# Altium PCB Mynd_Conn.PcbDoc
Units mm, origin at the board's own origin, x right, y up, seen from the top; angles counter-clockwise.
Board outline 27 x 54 mm, 2 copper layers (Component Side, Solder Side), stack 1.58 mm thick; 16 components, 8 nets, 36 pads, 18 vias.
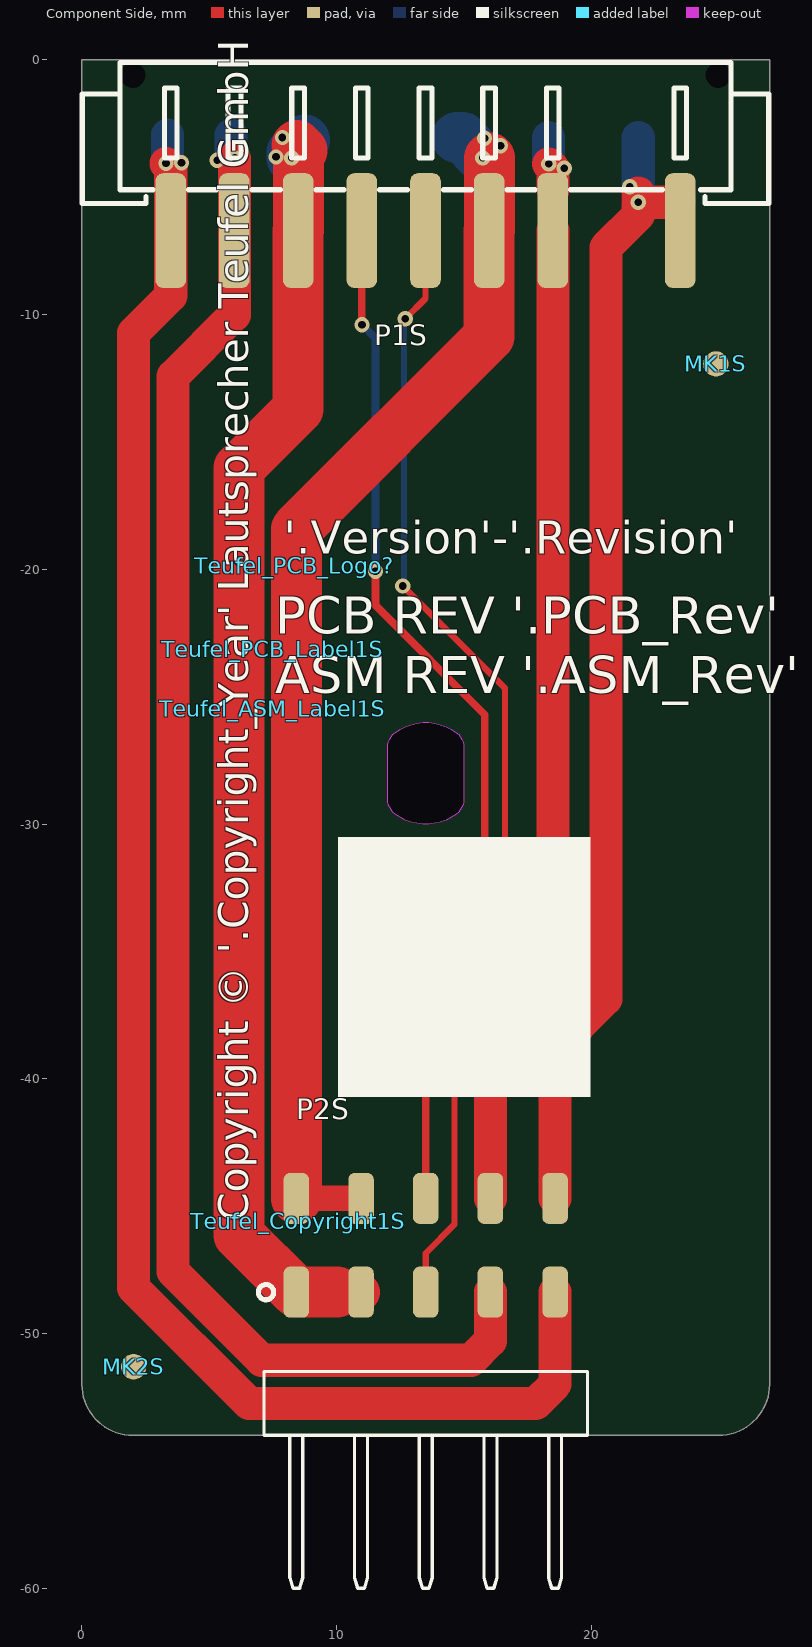
[diagram p0: Component Side view]
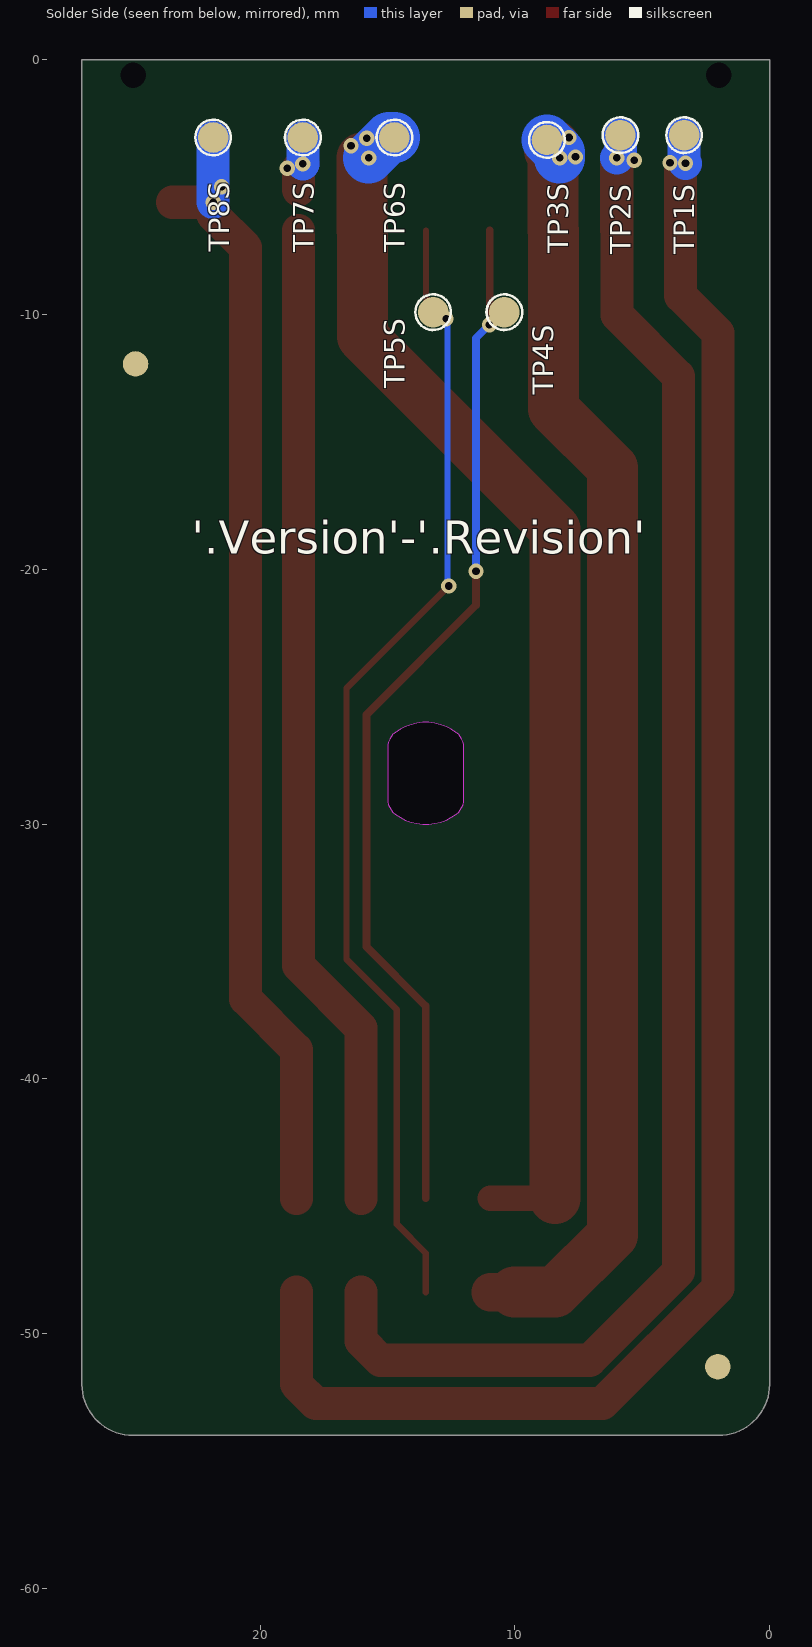
[diagram p1: Solder Side view, seen from below]

## Layer stack, top to bottom
Top Solder: solder mask 0.0102, Solder Resist, Dk 3.5
Component Side: signal copper 0.035
Dielectric1: core 1.5097, FR-4, Dk 4.2
Solder Side: signal copper 0.035
Bottom Solder: solder mask 0.0102, Solder Resist, Dk 3.5

## Board outline
2,-54 cw(c2,-52) 0,-52 0,0 27,0 27,-52 cw(c25,-52) 25,-54
cut-out: 12.3,-29.61 cw(c12.75,-29.01) 12,-29.01 12,-27.01 cw(c12.75,-27.01) 12.3,-26.41 cw(c13.5,-28.01) 14.7,-26.41 cw(c14.25,-27.01) 15,-27.01 15,-29.01 cw(c14.25,-29.01) 14.7,-29.61 cw(c13.5,-28.01)

## Design rules (kind name [scope] priority, off if disabled: settings)
AssemblyTestPointUsage [HasFootprint('PAD-NDK-06')] p1:
AssemblyTestpoint [HasFootprint('PAD-NDK-06')] p1: testpointundercomponent=TRUE minsize=1.016 maxsize=2.54 preferedsize=1.524 minholesize=0 maxholesize=1.016 preferedholesize=0.813 testpointgrid=0.025 usegrid=TRUE gridtolerance=0 allowsidetop=TRUE allowsidebottom=TRUE
Clearance [All] p1: gap=0.25 ignorepadtopadclearanceinfootprint=FALSE
Clearance Clearance_Poly [All] p2 off: gap=0.25 ignorepadtopadclearanceinfootprint=FALSE // Protel DXP Scope 1 Expression Was: InPoly
ComponentClearance ComponentClearance_Termofühler [HasFootprint('SOP65P1420X360_HS-44N') vs HasFootprint('TO-92_MCP9700')] p1: gap=0 collisioncheckmode=3 verticalgap=0.254 showdistances=FALSE
ComponentClearance ComponentClearance_Testpoint [InComponent('TP*')] p2: gap=0 collisioncheckmode=3 verticalgap=0.254 showdistances=FALSE
ComponentClearance ComponentClearance_MC16 [OnLayer('Component Side')] p3: gap=0 collisioncheckmode=3 verticalgap=0.254 showdistances=FALSE
ComponentClearance ComponentClearance_1 [All] p4: gap=0.2 collisioncheckmode=3 verticalgap=0.254 showdistances=FALSE
ComponentClearance ComponentClearance_Stiftleiste [HasFootprint('1X04RM254') vs HasFootprint('1X02RM254')] p5: gap=0 collisioncheckmode=3 verticalgap=0.254 showdistances=FALSE
FabricationTestpoint [All] p1: side=3 testpointundercomponent=TRUE minsize=0.5 maxsize=2.54 preferedsize=1.524 minholesize=0 maxholesize=1.016 preferedholesize=0.813 testpointgrid=0.025 allowsidetop=TRUE allowsidebottom=TRUE usegrid=TRUE gridtolerance=0
FanoutControl Fanout_LCC [All] p1 off: bgadir=Out bgaviamode=Centered fanoutstyle=Auto fanoutdirection=Alternating viagrid=0.025 // Protel DXP Scope 1 Expression Was: IsLCC   Fanout_LCC (Default Rule)
FanoutControl Fanout_BGA [All] p2 off: bgadir=Out bgaviamode=Centered fanoutstyle=Auto fanoutdirection=Alternating viagrid=0.025 // Protel DXP Scope 1 Expression Was: IsBGA   Fanout_BGA (Default Rule)
FanoutControl Fanout_SOIC [All] p3 off: bgadir=Out bgaviamode=Centered fanoutstyle=Auto fanoutdirection=Alternating viagrid=0.025 // Protel DXP Scope 1 Expression Was: IsSOIC   Fanout_SOIC (Default Rule)
FanoutControl Fanout_Default [All] p4: bgadir=Out bgaviamode=Centered fanoutstyle=Auto fanoutdirection=Alternating viagrid=0.025 // Fanout_Default (Default Rule)
FanoutControl Fanout_Small [All] p5 off: bgadir=Out bgaviamode=Centered fanoutstyle=Auto fanoutdirection=Alternating viagrid=0.025 // Protel DXP Scope 1 Expression Was: (CompPinCount < 5)   Fanout_Small (Default Rule)
HoleSize [All] p1: absolutevalues=TRUE maxlimit=8 minlimit=0.25 maxpercent=80.000 minpercent=20.000
PlaneClearance [All] p1: clearance=0.3
PlaneConnect [All] p1: planeconnectstyle=Relief reliefexpansion=0.508 reliefentries=4 reliefconductorwidth=0.5 reliefairgap=0.254
PolygonConnect [All] p1: connectstyle=Direct reliefconductorwidth=0.5 reliefentries=4 polygonreliefangle="45 Angle" airgapwidth=0.254
PolygonConnect PolygonConnect_direct_stepup [All] p2 off: connectstyle=Direct reliefconductorwidth=0.254 reliefentries=4 polygonreliefangle="90 Angle" airgapwidth=0.254 // Protel DXP Scope 1 Expression Was: (InNet('NETC548_1') AND IsNamedPolygon('BOT_STEPUP_L502OUT')) OR (InNet('NetL502_1') AND IsNamedPolygon('BOT_STEPUP_L502IN')) OR     (InNet('NetC504_2') AND IsNamedPolygon('BOT_STEPUP_IN')) OR   (InNet('24V') AND IsNamedPolygon('BOT_STEPUP_24VOUT')) OR (InNet('GND') AND (IsNamedPolygon('BOT_STEPUP_GND') OR                     IsNamedPolygon('tga') OR                                    IsNamedPolygon('TOP_GLOBAL_GND')                   ) )
PolygonConnect PolygonConnect_VIA [All] p3 off: connectstyle=Direct reliefconductorwidth=0.2 reliefentries=4 polygonreliefangle="90 Angle" airgapwidth=0.254 // Protel DXP Scope 1 Expression Was: isVia  or HasFootprint('HOLE_3.2_6.0') or  HasFootprint('CAPPR750W80D1600H2500') or HasFootprint('JST_B6P-VH-FB-B') or HasFootprint('JST_B2P-VH-FB-B') or HasFootprint('TE_1734366-3')
PolygonConnect PolygonConnect_direct [All] p4 off: connectstyle=Direct reliefconductorwidth=0.254 reliefentries=4 polygonreliefangle="90 Angle" airgapwidth=0.254 // Protel DXP Scope 1 Expression Was: InNet('OUT_A') or InNet('OUT_B') or InNet('OUT_C') or InNet('OUT_D') or InNet('SW1_N') or InNet('SW1_P') or InNet('SW2_N') or InNet('SW2_P') or InNet('NetC500_1') or InNet('NetC500_2') or IsNamedPolygon('BOTTOM_-5V_GND') or IsNamedPolygon('BOTTOM_5V_GND') or IsNamedPolygon('BOTTOM_3V3_GND') or IsNamedPolygon('TOP_24V') or IsNamedPolygon('BOT_5VChg_SW_Node') or ((InNet('41V')) and IsSMTPin)
PolygonConnect PolygonConnect_GND_RC_1 [All] p5 off: connectstyle=Relief reliefconductorwidth=0.5 reliefentries=4 polygonreliefangle="90 Angle" airgapwidth=0.254 // Protel DXP Scope 1 Expression Was: IsNamedPolygon('GND_RC_1')
RoutingVias [All] p1: holewidth=0.3 width=0.7 viastyle="Through Hole" minholewidth=0.25 minwidth=0.5 maxholewidth=6 maxwidth=8
ShortCircuit ShortCircuit_Antenna [InNet('ANTENNA')] p2: allowed=TRUE
SilkToSolderMaskClearance [All] p1 off: minsilkscreentomaskgap=0.254 clearancetoexposedcopper=TRUE // Protel DXP Scope 1 Expression Was: IsPad
SolderMaskExpansion [All] p1: expansion=0.102 istentingtop=FALSE
Width [All] p1: maxlimit=20 minlimit=0.25 preferedwidth=1
17 further rules are at their usual default settings.

## Components (designator, comment, footprint, x,y, rotation, side; value= is the part's Value field where it differs from the comment)
MK1S "MARK" MARK 24.892,-11.938 r90 top
MK2S "MARK" MARK 2.032,-51.308 r90 top
P1S "CJL008DH250197" CJL008DH250197 13.49,-0.6 r180 top locked
P2S "2.54PH H2.5 2x5Pin" Pin_Header_SMD_Side_2X5_254 13.5,-51.5 r90 top locked
Teufel_ASM_Label1S "2.1" Teufel_ASM_Rev 7.493,-25.476 r0 top
Teufel_Copyright1S "2023" Teufel_Copyright 8.5,-45.6 r90 top
Teufel_PCB_Label1S "2.1" Teufel_PCB_Rev 7.493,-23.139 r0 top
Teufel_PCB_Logo? "T.3.0.0040-2.1" Teufel_NoLogo 8.331,-19.863 r0 top
TP1S "TP12" TP120 3.355,-2.957 r90 bottom
TP2S "TP12" TP120 5.855,-2.957 r90 bottom
TP3S "TP12" TP120 8.74,-3.143 r90 bottom
TP4S "TP12" TP120 10.414,-9.906 r90 bottom
TP5S "TP12" TP120 13.208,-9.906 r90 bottom
TP6S "TP12" TP120 14.732,-3.048 r90 bottom
TP7S "TP12" TP120 18.325,-3.048 r90 bottom
TP8S "TP12" TP120 21.844,-3.048 r90 bottom

## Footprints (in the part's own frame and the unit in brackets; to place one, negate y for a bottom-side part, rotate by r counter-clockwise, add the part's x,y. Pads: shape width x height; smd on the part's side, far side on the other; paste and mask are expansions set on the pad)
CJL008DH250197 [mm] "CJL008DH250197 Battery 2.5PH 180¶ÈÁ¢Ìù±ßÖù Ä¸×ù"
  rrect50% 1.2x4.5 smd mask+0: 1(-10,6.1) 2(-5,6.1) 3(-2.5,6.1) 4(0,6.1) 5(2.5,6.1) 6(5,6.1) 7(7.5,6.1) 8(10,6.1)
  round 0 hole 1 unplated: M1(-11.5,0) M2(11.5,0)
  silkscreen extent -13.48,-0.5 13.48,5.04, body extent -13.47,-0.48 13.48,7.04, height 6.61
MARK [mm] "MARK DOT 1mm"
  rect 1.5x1.5 on Top Solder: 0(0,0)
  rect 1.5x1.5 on Bottom Solder: 1(0,0)
  round 1 smd far side mask+0: MK_B(0,0)
  round 1 smd mask+0: MKT(0,0)
  Component Side pour cut-out: -0.75,-0.75 0.75,-0.75 0.75,0.75 -0.75,0.75
  Solder Side pour cut-out: -0.75,-0.75 0.75,-0.75 0.75,0.75 -0.75,0.75
Pin_Header_SMD_Side_2X5_254 [mm] "Pin header  SMD  dual row   2.54mm  10pin Side Connector"
  rrect50% 2x1 smd: 1(3.12,5.08) 2(6.8,5.08) 3(3.12,2.54) 4(6.8,2.54) 5(3.12,0) 6(6.8,0) 7(3.12,-2.54) 8(6.8,-2.54) 9(3.12,-5.08) 10(6.8,-5.08)
  silkscreen extent -8.5,-6.35 3.42,6.57, body extent -8.5,-6.35 7.62,6.35, height 5.03
Teufel_ASM_Rev [mm]
Teufel_Copyright [mm]
Teufel_NoLogo [mm] "Teufel NoLogo"
Teufel_PCB_Rev [mm]
TP120 [mm] "TEST PAD 1.2mm"
  round 1.2 smd: 1(0,0)
  silkscreen extent -0.7,-0.7 0.7,0.7

## Part data
MK1S MK2S: library part N-001-00003-2, "MARK DOT", Design Item ID=MARK
P1S: library part C-001-1104-3, "SMD BTB CONNECTOR 8P P2.5mm GOLD", Manufacturer=CHUANGJIEL, Part_Number=CJL008DH250197, Part_Type="Connector BTB SMT", System=Connector
P2S: library part C-001-1092-3, "SMD BTB CONNECTOR 10P P2.54mm GOLD", Manufacturer=MINGHENG, Part_Number="2.54PH H2.5 2x5Pin", Part_Type="Connector BTB SMT", System=Connector
Teufel_ASM_Label1S: library part Teufel_ASM_Rev, "Teufel Assembly Rev. PCB Label"
Teufel_Copyright1S: library part Teufel_Copyright, "Teufel Copyright PCB Label"
Teufel_PCB_Label1S: library part Teufel_PCB_Rev, "Teufel PCB Rev. PCB Label"
Teufel_PCB_Logo?: library part "Teufel NoLogo", "Teufel PCB NoLogo"
TP1S TP2S TP3S TP4S TP5S TP6S TP7S TP8S: library part N-001-00010-2, "Test Point", Design Item ID=TP

## Via types
v1: diameter 0.6, hole 0.3, Component Side to Solder Side, tented both sides, 18 vias

## Nets (pads, with @x,y where several pads share a name; then routed paths per layer and width w, separated by ;. In a path a pad name is that pad's centre, name@x,y a point inside that pad or via, vN(x,y) a via of type N, cw(c..) or ccw(c..) an arc to the next point about the centre after c; other vN are vias at no path point)
BatVCC: P1S.5 P2S.6 TP4S.1 | length 41
  Component Side w0.3: P1S.5 10.99,-10.4 v1(11,-10.4) ; v1(11.528,-20.072) 11.528,-21.409 15.824,-25.705 15.824,-34.823 13.5,-37.148 P2S.6
  Solder Side w0.3: v1(11,-10.4) 11,-10.405 11.528,-10.933 v1(11.528,-20.072)
C_Open: P1S.4 P2S.5 TP5S.1 | length 45
  Component Side w0.25: v1(12.594,-20.657) 16.612,-24.674 16.612,-35.306 14.63,-37.287 14.63,-45.72 13.5,-46.85 P2S.5 ; v1(12.7,-10.16) 13.49,-9.37 P1S.4
  Solder Side w0.25: v1@12.563,-20.626 12.647,-20.542 12.647,-10.213 v1(12.7,-10.16)
SW_N: P1S.3 P2S.2 P2S.4 TP6S.1 | length 47.9
  Component Side w1: P2S.2 P2S.4
  Component Side w2: P2S.2 8.42,-18.428 15.99,-10.857 P1S.3 16,-6.69 v1@16,-3.85
  Solder Side w2: TP6S.1 14.938,-3.048 v1(15.74,-3.85)
  other v1: 16.435,-3.374 15.81,-3.083
SW_P: P1S.6 P2S.1 P2S.3 TP3S.1 | length 50.5
  Component Side w1.5: 10.023,-48.38 P2S.3
  Component Side w2: 8.442,-3.362 8.636,-3.556 8.5,-3.692 8.5,-6.69 P1S.6 8.49,-13.709 6.17,-16.03 6.17,-46.13 P2S.1 10.023,-48.38
  Solder Side w2: v1(8.24,-3.85) 8.24,-3.643 TP3S.1
  other v1: 7.62,-3.81 7.874,-3.048
TW_L_N: P1S.1 P2S.10 TP8S.1 | length 45
  Component Side w1.3: P2S.10 18.58,-38.862 20.574,-36.868 20.574,-7.366 21.844,-6.096 v1(21.844,-5.588) ; 21.844,-5.23 v1(21.844,-5.588) ; P1S.1@23.44,-5.588 v1(21.844,-5.588)
  Solder Side w1.3: v1(21.844,-5.588) TP8S.1
  other v1: 21.514,-4.978
TW_L_P: P1S.2 P2S.8 TP7S.1 | length 41.1
  Component Side w1.3: P2S.8 16.04,-38.01 18.49,-35.56 P1S.2 ; v1(18.325,-4.085) 18.49,-4.25 P1S.2@18.49,-5.1
  Solder Side w1.3: v1(18.325,-4.085) TP7S.1
  other v1: 18.935,-4.26
TW_R_N: P1S.8 P2S.9 TP1S.1 | length 68.3
  Component Side w1.3: v1(3.302,-4.064) 3.49,-4.252 3.49,-9.26 2.032,-10.719 2.032,-48.218 6.564,-52.75 17.819,-52.75 18.58,-51.988 P2S.9
  Solder Side w1.3: v1(3.302,-4.064) 3.355,-4.011 TP1S.1
  other v1: 3.912,-4.039
TW_R_P: P1S.7 P2S.7 TP2S.1 | length 61.8
  Component Side w1.3: v1(6,-3.85) 6,-6.69 P1S.7 5.99,-10.012 3.582,-12.42 3.582,-47.576 7.06,-51.054 15.279,-51.054 16.04,-50.292 P2S.7
  Solder Side w1.3: TP2S.1 5.855,-3.705 v1(6,-3.85)
  other v1: 5.309,-3.937
pads on no net: MK1S.0 MK1S.1 MK1S.MK_B MK1S.MKT MK2S.0 MK2S.1 MK2S.MK_B MK2S.MKT P1S.M1 P1S.M2

## Silkscreen, mask and mechanical layers (free items; w line width, h text height)
Top Overlay:
  region: 19.975,-30.512 10.05,-30.512 10.05,-40.712 19.975,-40.712
Mechanical 1:
  lines w0.15: 0,-52.01 ccw(c2,-52.01) 2,-54.01 25,-54.01 ccw(c25,-52.01) 27,-52.01 27,-0.01 0,-0.01 0,-52.01 ; 12,-29.01 ccw(c12.75,-29.01) 12.3,-29.61 ccw(c13.5,-28.01) 14.7,-29.61 ccw(c14.25,-29.01) 15,-29.01 15,-27.01 ccw(c14.25,-27.01) 14.7,-26.41 ccw(c13.5,-28.01) 12.3,-26.41 ccw(c12.75,-27.01) 12,-27.01 12,-29.01
Mechanical 2:
  drawing of 4098 lines, arcs and shapes, not listed
  text "Layer" at 34.724,-3.124 h1.52
  text "Name" at 45.136,-3.124 h1.52
  text "Material" at 69.005,-3.124 h1.52
  text "Thickness" at 90.843,-3.124 h1.52
  text "Constant" at 107.349,-3.124 h1.52
  text "Top Overlay" at 45.136,-6.172 h1.52
  text "Top Solder" at 45.136,-9.22 h1.52
  text "Solder Resist" at 69.005,-9.22 h1.52
  text "0,010mm" at 90.843,-9.22 h1.52
  text "3.5" at 107.349,-9.22 h1.52
  text "1" at 34.724,-12.268 h1.52
  text "Component Side" at 45.136,-12.268 h1.52
  text "0,035mm" at 90.843,-12.268 h1.52
  text "Dielectric1" at 45.136,-15.316 h1.52
  text "FR-4" at 69.005,-15.316 h1.52
  text "1,510mm" at 90.843,-15.316 h1.52
  text "4.2" at 107.349,-15.316 h1.52
  text "2" at 34.724,-18.364 h1.52
  text "Solder Side" at 45.136,-18.364 h1.52
  text "0,035mm" at 90.843,-18.364 h1.52
  text "Bottom Solder" at 45.136,-21.412 h1.52
  text "Solder Resist" at 69.005,-21.412 h1.52
  text "0,010mm" at 90.843,-21.412 h1.52
  text "3.5" at 107.349,-21.412 h1.52
  text "Bottom Overlay" at 45.136,-24.46 h1.52
  text "Total board thickness:" at 34.724,-27.508 h1.52
  text "1,600mm" at 90.843,-27.508 h1.52
  text "Minimum Track Width: 0.25mm" at 35.306,-30.683 h1.52
Top Assembly:
  drawing of 4053 lines, arcs and shapes, not listed
Drill Drawing:
  lines w0.381: 33.841,-54.381 133.333,-54.381 ; 33.841,-39.141 133.333,-39.141 ; 48.443,-58.191 48.443,-35.331 ; 66.777,-58.191 66.777,-35.331 ; 79.626,-58.191 79.626,-35.331 ; 98.264,-58.191 98.264,-35.331 ; 113.247,-58.191 113.247,-35.331 ; 33.841,-58.191 133.333,-58.191 133.333,-35.331 33.841,-35.331 33.841,-58.191
  text "Count" at 36.127,-37.998 h1.83
  text "Hole Size" at 49.586,-37.998 h1.83
  text "Plated" at 67.92,-37.998 h1.83
  text "Hole Type" at 80.769,-37.998 h1.83
  text "Via/Pad" at 99.407,-37.998 h1.83
  text "Pad Shape" at 114.39,-37.998 h1.83
  text "1" at 36.127,-41.808 h1.52
  text "0,300mm" at 49.586,-41.808 h1.52
  text "PTH" at 67.92,-41.808 h1.52
  text "Round" at 80.769,-41.808 h1.52
  text "Via" at 99.407,-41.808 h1.52
  text "Rounded" at 114.39,-41.808 h1.52
  text "4" at 36.127,-45.618 h1.52
  text "0,500mm" at 49.586,-45.618 h1.52
  text "PTH" at 67.92,-45.618 h1.52
  text "Round" at 80.769,-45.618 h1.52
  text "Via" at 99.407,-45.618 h1.52
  text "Rounded" at 114.39,-45.618 h1.52
  text "4" at 36.127,-49.428 h1.52
  text "0,800mm" at 49.586,-49.428 h1.52
  text "PTH" at 67.92,-49.428 h1.52
  text "Round" at 80.769,-49.428 h1.52
  text "Pad" at 99.407,-49.428 h1.52
  text "Rounded" at 114.39,-49.428 h1.52
  text "10" at 36.127,-53.238 h1.52
  text "1,100mm" at 49.586,-53.238 h1.52
  text "PTH" at 67.92,-53.238 h1.52
  text "Round" at 80.769,-53.238 h1.52
  text "Pad" at 99.407,-53.238 h1.52
  text "(Mixed)" at 114.39,-53.238 h1.52
  text "19 Total" at 36.127,-57.048 h1.52

## Text inside footprints (layer, text, board x,y; h text height)
Teufel_ASM_Label1S: Top Overlay "ASM REV '.ASM_Rev'" at 7.595,-25.349 h2.5
Teufel_Copyright1S: Top Overlay "Copyright © '.Copyright_Year' Lautsprecher Teufel GmbH" at 6.918,-45.6 h2 r90
Teufel_PCB_Label1S: Top Overlay "PCB REV '.PCB_Rev'" at 7.595,-23.012 h2.5